# Altium PCB PCB1.PcbDoc
Units mil, origin at the board's own origin, x right, y up, seen from the top; angles counter-clockwise.
Board outline 990 x 2450 mil, 2 copper layers (Top Layer, Bottom Layer); 20 components, 19 nets, 95 pads, 46 vias.
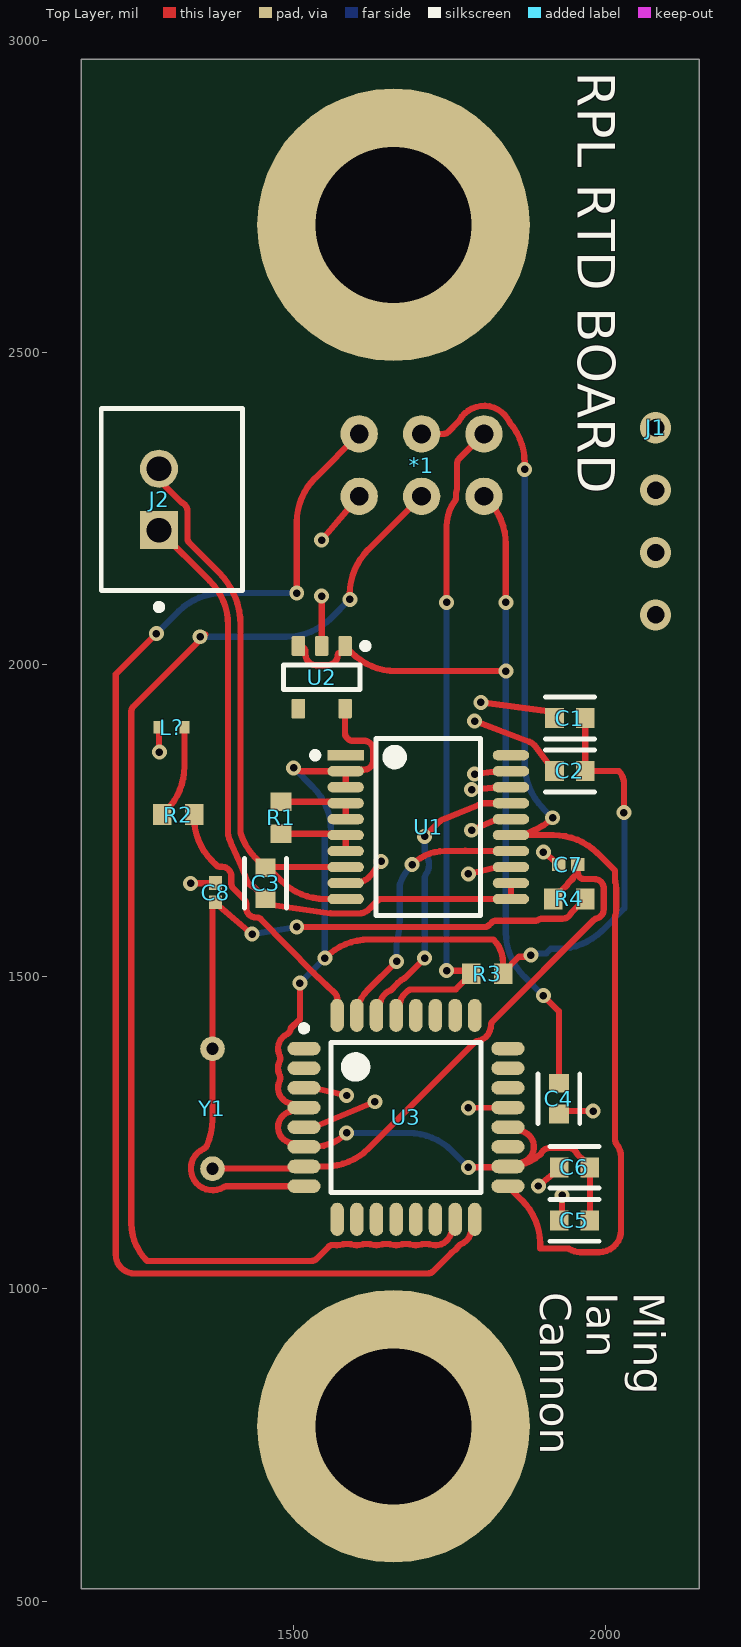
[diagram p0: Top Layer view]
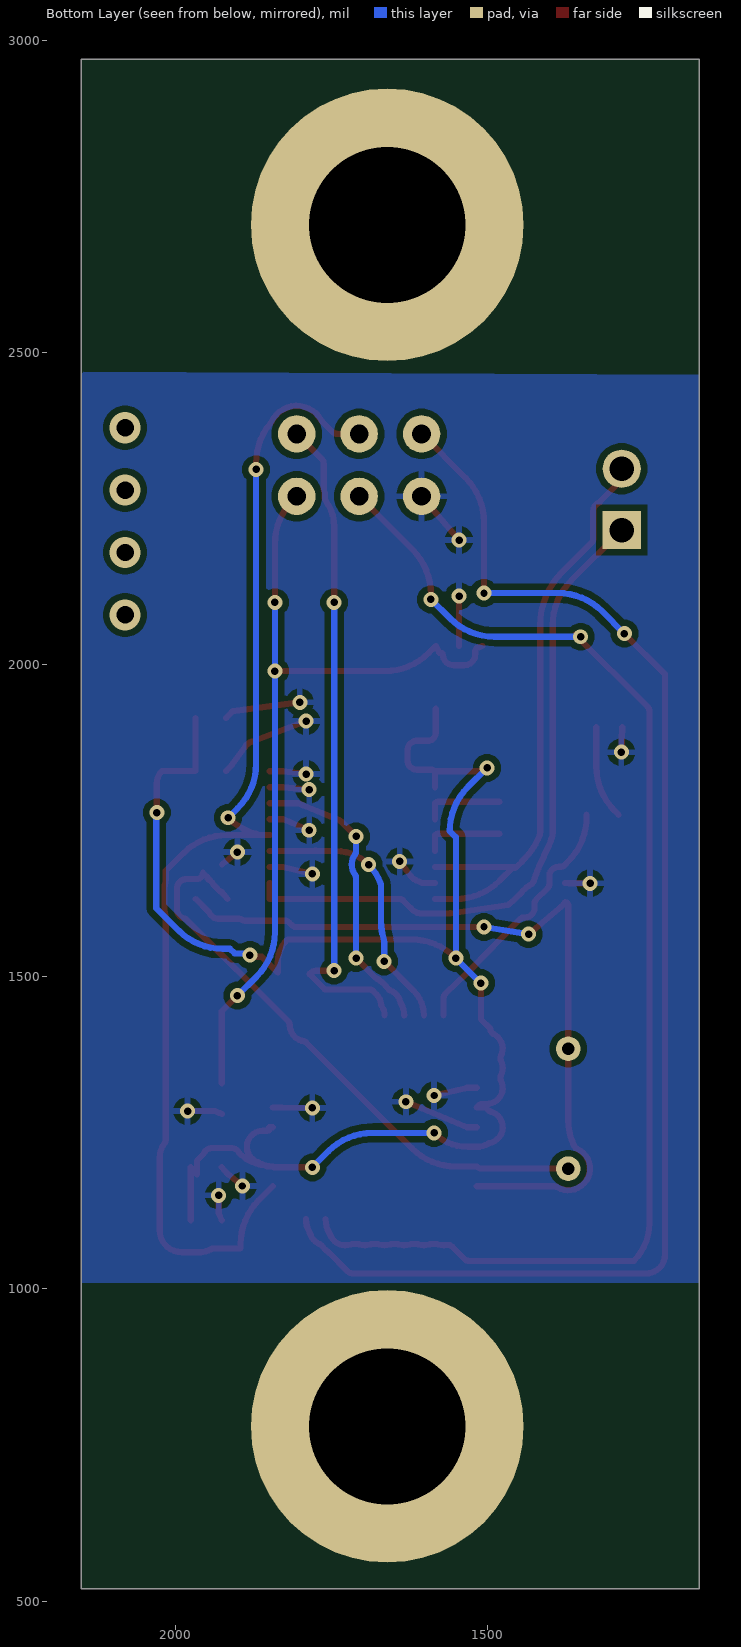
[diagram p1: Bottom Layer view, seen from below]

## Layer stack, top to bottom
Top Solder: solder mask 0.4, Solder Resist, Dk 3.5
Top Layer: signal copper 1.4
Dielectric 1: dielectric 12.6, FR-4, Dk 4.8
Bottom Layer: signal copper 1.4
Bottom Solder: solder mask 0.4, Solder Resist, Dk 3.5

## Board outline
1160,520 2150,520 2150,2970 1160,2970

## Design rules (kind name [scope] priority, off if disabled: settings)
Clearance [All] p1: gap=10 ignorepadtopadclearanceinfootprint=TRUE except(0: Arc-Hole Track-Hole SMDPad-Hole THPad-Hole Via-Hole Fill-Hole Poly-Hole Region-Hole Text-Hole)
PolygonConnect [All] p1: connectstyle=Relief reliefconductorwidth=10 reliefentries=4 polygonreliefangle="90 Angle" airgapwidth=10
RoutingVias Via [All] p1: holewidth=12 width=24 viastyle="Through Hole" minholewidth=12 minwidth=24 maxholewidth=12 maxwidth=24
SolderMaskExpansion [All] p1: expansion=4 istentingtop=FALSE
Width [All] p1: maxlimit=10 minlimit=10 preferedwidth=10
30 further rules are at their usual default settings.

## Components (designator, comment, footprint, x,y, rotation, side; value= is the part's Value field where it differs from the comment)
*1 "AVR ISP 6 PIN HEADER" "AVR ISP 6 PIN HEADER" 1605,2370 r0 top
C1 "100nF" FP-GCM188-0_1-IPC_C 1942.73,1914.81 r0 top
C2 "100nF" FP-GCM188-0_1-IPC_C 1942.73,1830 r180 top
C3 "100nF" FP-GCM188-0_1-IPC_C 1455,1650 r90 top
C4 "100nF" FP-GCM188-0_1-IPC_C 1925,1305 r90 top
C5 "100nF" FP-GCM188-0_1-IPC_C 1950,1110 r0 top
C6 "100nF" FP-GCM188-0_1-IPC_C 1950,1195 r0 top
C7 "22p" CAPC1005X06L 1940,1680 r180 top
C8 "22p" CAPC1005X06L 1375,1635 r90 top
J1 "JST-XH 4" C146120 2080,2380 r270 top
J2 "JST-XH 2" FP-B2B-XH-A_LF_SN-MFG 1305,2265 r90 top
L? "Blue LED" C165977 1283.66,1900 r0 top
R1 "5k1" RESC1608X06L 1480,1755 r90 top
R2 "330" RESC1608X06L 1315,1760 r0 top
R3 "10k" RESC1608X06L 1810,1505 r0 top
R4 "1MOhm" RESC1608X06L 1941.51,1625 r0 top
U1 "RTD-DIGITAL CONVERTER" FP-A20-1-IPC_C 1715.75,1740 r0 top
U2 "Linear Regulator" DBV0005A_L 1545,1980 r270 top
U3 "ATMEGA328P-AU" 32A_L 1680,1275 r0 top
Y1 "8Mhz" C107425 1370,1192.87 r90 top

## Footprints (in the part's own frame and the unit in brackets; to place one, negate y for a bottom-side part, rotate by r counter-clockwise, add the part's x,y. Pads: shape width x height; smd on the part's side, far side on the other; paste and mask are expansions set on the pad)
32A_L [mm] "Thin QFP, 32-Leads, Body 7x7mm, Pitch 0.8mm, IPC High Density"
  oval 1.35x0.55 smd: 1(-4.15,2.8) 2(-4.15,2) 3(-4.15,1.2) 4(-4.15,0.4) 5(-4.15,-0.4) 6(-4.15,-1.2) 7(-4.15,-2) 8(-4.15,-2.8) 17(4.15,-2.8) 18(4.15,-2) 19(4.15,-1.2) 20(4.15,-0.4) 21(4.15,0.4) 22(4.15,1.2) 23(4.15,2) 24(4.15,2.8)
  oval 0.55x1.35 smd: 9(-2.8,-4.15) 10(-2,-4.15) 11(-1.2,-4.15) 12(-0.4,-4.15) 13(0.4,-4.15) 14(1.2,-4.15) 15(2,-4.15) 16(2.8,-4.15) 25(2.8,4.15) 26(2,4.15) 27(1.2,4.15) 28(0.4,4.15) 29(-0.4,4.15) 30(-1.2,4.15) 31(-2,4.15) 32(-2.8,4.15)
  silkscreen extent -4.27,-3.05 3.05,3.75, body extent -3.5,-3.5 3.5,3.5, height 1.2
"AVR ISP 6 PIN HEADER" [mil]
  round 60 hole 30: 1(0,0) 2(100,0) 3(200,0) 4(0,-100) 5(100,-100) 6(200,-100)
C107425 [mm]
  round 1 hole 0.5: 1(0,0) 2(4.88,0)
C146120 [mil]
C165977 [mm]
  rect 0.4x0.5 smd: 1(0,0) 2(1.05,0)
CAPC1005X06L [mm] "Chip Capacitor, 2-Leads, Body 1.00x0.50mm, IPC High Density"
  rect 0.56x0.52 smd: 1(-0.39,0) 2(0.39,0)
  body extent -0.53,-0.28 0.53,0.28, height 0.55
DBV0005A_L [mm] "SOT23, 5-Leads, Body 3.05x1.75mm, Pitch 0.95mm, IPC High Density"
  rrect18% 0.8x0.55 smd: 1(-1.275,0.95) 2(-1.275,0) 3(-1.275,-0.95) 4(1.275,-0.95) 5(1.275,0.95)
  silkscreen extent -1.4,-1.55 0.5,1.9, body extent -1.42,-1.46 1.42,1.46, height 1.08
FP-A20-1-IPC_C [mm]
  rect 1.482x0.418 smd paste+0 mask+0: 1(-3.364,2.925)
  rrect100% 1.482x0.418 smd paste+0 mask+0: 2(-3.364,2.275) 3(-3.364,1.625) 4(-3.364,0.975) 5(-3.364,0.325) 6(-3.364,-0.325) 7(-3.364,-0.975) 8(-3.364,-1.625) 9(-3.364,-2.275) 10(-3.364,-2.925) 11(3.364,-2.925) 12(3.364,-2.275) 13(3.364,-1.625) 14(3.364,-0.975) 15(3.364,-0.325) 16(3.364,0.325) 17(3.364,0.975) 18(3.364,1.625) 19(3.364,2.275) 20(3.364,2.925)
  silkscreen extent -4.73,-3.6 2.12,3.6, body extent -4.2,-3.7 4.2,3.7, height 0.25
FP-B2B-XH-A_LF_SN-MFG [mm]
  rect 1.55x1.55 hole 1 paste-1000 mask+0: 1(-1.25,0.525)
  round 1.55 hole 1 paste-1000 mask+0: 2(1.25,0.525)
  silkscreen extent -4.5,-2.87 3.7,2.88, body extent -3.8,-2.98 3.8,2.98, height 0.25
FP-GCM188-0_1-IPC_C [mil]
  rect 29.87x31.97 smd paste+0 mask+0: 1(-24.67,0) 2(24.67,0)
  silkscreen extent -40,-33 40,33, body extent -44,-22 44,22, height 10
RESC1608X06L [mm] "Chip Resistor, 2-Leads, Body 1.60x0.85mm, IPC High Density"
  rect 0.75x0.85 smd: 1(-0.65,0) 2(0.65,0)
  body extent -0.87,-0.48 0.87,0.48, height 0.55

## Part data
C1 C2 C3 C4 C5 C6: library part C83054, Case/Package=0603, Dielectric=X8R, Max Operating Temperature=150°C, Min Operating Temperature=-55°C, Tolerance=10%, Voltage Rating (DC)=25V, Capacitance=100nF, Depth=0.8mm, Lead Free="Lead Free", Length=1.6mm, Packaging="Tape and Reel", Supplier 1=Digi-Key
C7 C8: library part C161315
J1: library part C146120
J2: library part C20079, "CONN HEADER VERT 2POS 2.5MM", Color=Natural, Contact Resistance=20mR, Current Rating=3A, Housing Color=White, Insulation Resistance=1GR, Max Operating Temperature=85°C, Max Voltage Rating (AC)=250V, Min Operating Temperature=-25°C, Supplier Part Number 1=8201554, Connector Type="Male Pin", Contact Material=Brass, Contact Plating=Tin, Contact Type="Male Pin", Depth=5.75mm, Fastening Type=Detent, Housing Material=Polyamide, Lead Free="Lead Free", Lead Pitch=2.5mm, Length=7.4mm, Max Current Rating=3A, Max Voltage Rating (DC)=250V, Mount="Through Hole", Number of Contacts=2, Number of Positions=2, Number of Rows=1, Orientation=Straight, Packaging=Bulk, Pitch=2.5mm, REACH SVHC="No SVHC", Series=XH, Supplier 1=RSComponents, Termination=Solder, Voltage Rating=250V, Voltage Rating (AC)=250V, Wire/Cable Gauge=22AWG
L?: library part C165977
R1: library part C23186, Manufacturer=Panasonic, Part Number=ERJ-3EKF5101V
R2: library part C23138, Manufacturer=Panasonic, Part Number=ERJ1GNF1004C
R3: library part C25804, Manufacturer=Panasonic, Part Number=ERJ-3EKF5101V
R4: library part C22935, Manufacturer=Panasonic, Part Number=ERJ1GNF1004C
U1: library part C779509, "IC RTD TO DIGITAL CONVERT 20SSOP", Case/Package=SSOP, Max Operating Temperature=125°C, Min Operating Temperature=-40°C, Mount="Surface Mount", Output Type=SPI, Packaging="Tape and Reel"
U2: library part C202242, "Single Output Fast Transient Response LDO, 250 mA, Fixed 3.3 V Output, 1.8 to 12 V Input, 5-pin SOT-23 (DBV), -55 to 125 degC, Green (RoHS & no Sb/Br)", Manufacturer="Texas Instruments", PartNumber=REG102NA-3.3/3K, Accuracy(%)=1.5, Code_JEDEC=MO-178, ComponentLink1Description="Manufacturer URL", ComponentLink1URL=http://www.ti.com/, ComponentLink2Description=Datasheet, ComponentLink2URL=http://www.ti.com/general/docs/lit/getliterature.tsp?genericPartNumber=REG102-33&fileType=pdf, ComponentLink3Description="Package Specification", ComponentLink3URL=http://www.ti.com/litv/pdf/mpds018i, DatasheetVersion=SBVS024F, Eco-Plan="Green (RoHS & no Sb/Br)", Fixed Output Options(V)=3.3, Iout(Max)(A)=0.25, Iq(Typ)(mA)=0.4, Mounting Technology="Surface Mount", PackageDescription="5-Pin Plastic Small Outline, Body 1.60 Ãƒâ€” 2.90 mm, Pitch 0.95 mm", PackageReference=DBV0005A, PackageVersion=4073253-4/K, SubFamily="Single Channel LDO", Vdo(Typ)(mV)=150, Vin(Max)(V)=12, Vin(Min)(V)=1.8, Vout Adj(Max)(V)=3.3, Vout Adj(Min)(V)=3.3
U3: library part C14877, "8-bit AVR Microcontroller, 32KB Flash, 1KB EEPROM, 2KB SRAM, 32-pin TQFP, Industrial Grade (-40°C to 85°C)", Supplier Part Number 1=1310271, Code_JEDEC=MS-026-ABA, ComponentLink1Description="Manufacturer URL", ComponentLink1URL=http://www.atmel.com/, ComponentLink2Description="ATmega48A/48PA/88A/88PA/168A/168PA/328/328P Datasheet", ComponentLink2URL=http://www.atmel.com/dyn/resources/prod_documents/doc8271.pdf, ComponentLink3Description="ATmega48A/48PA/88A/88PA/168A/168PA/328/328P Summary", ComponentLink3URL=http://www.atmel.com/dyn/resources/prod_documents/8271S.pdf, DatasheetVersion="revD, May-2011", PackageDescription="32-Lead, 7x7x1.0 mm Body, 0.8mm Lead Pitch, Thin Profile Plastic Quad Flat Package (TQFP)", PackageReference=32A, PackageVersion="revC, Oct-2010", RevisionNote="DatasheetVersion & PackageVersion updated. URLs added.", Supplier 1=RSComponents
Y1: library part C107425, "Resistance Weld Crystal, 8 MHz, +/- 30 ppm, -20 to 70 degC, 2-Pin SMD, RoHS, Tape and Reel", Case/Package=SMD/SMT, ESR (Equivalent Series Resistance)=80Ohm, Frequency=8MHz, Frequency Stability=50ppm, Frequency Tolerance=30ppm, Load Capacitance=20pF, Manufacturer="FOX Electronics", Max Operating Temperature=70degC, Min Operating Temperature=-20degC, Package Description="2-Pin Surface Mount Device, Body 5 x 11.7 mm", Package Quantity=1000, Package Reference=HC49SDLF, Datasheet URL=http://www.foxonline.com/pdfs/hc49sdlf.pdf, Datasheet Version=42064.0, Depth=5mm, Height=4.5mm, Lead Free=LeadFree, Length=11.7mm, Manufacturer URL=http://www.foxonline.com/, Mount=SurfaceMount, Number of Pins=2, Packaging=TapeandReel, Radiation Hardening=No, REACH SVHC=NoSVHC, RoHSCompliant=True, Series Resistance=80Ohm, Termination=SMD/SMT, Tolerance=50ppm, Width=5mm

## Free pads (board coordinates)
  round 437 hole 250: 0(1660,780) 0(1660,2705)

## Via types
v1: diameter 24, hole 12, Top Layer to Bottom Layer, 42 vias
v2: diameter 50, hole 28, Top Layer to Bottom Layer, 4 vias

## Nets (pads, with @x,y where several pads share a name; then routed paths per layer and width w, separated by ;. In a path a pad name is that pad's centre, name@x,y a point inside that pad or via, vN(x,y) a via of type N, cw(c..) or ccw(c..) an arc to the next point about the centre after c; other vN are vias at no path point)
3V3: C1.2 C2.1 C5.2 C6.2 R3.2 U1.2 U1.3 U2.5 U3.4 U3.6 U3.18 U3.20 | length 2683.9
  Top Layer w10: v1(1500,1835) ccw(c1513.12,1848.12) 1513.12,1829.57 U1.2 ; v1(1510,1490) 1510,1432.31 1495,1417.31 cw(c1485,1417.36) 1489.47,1408.41 ccw(c1500.87,1385.24) 1477.68,1373.85 cw(c1468.69,1369.49) 1477.68,1365.12 ccw(c1500.87,1353.74) 1477.68,1342.36 cw(c1468.69,1337.99) 1477.69,1333.63 ccw(c1500.87,1322.24) 1500.87,1296.42 1506.97,1296.42 cw(c1506.92,1286.42) 1514.28,1293.19 ccw(c1568.79,1342.93) 1516.39,1290.97 cw(c1509.25,1283.97) 1516.54,1290.81 U3.4@1516.54,1290.75 ; v1(1550,1530) 1550.71,1530.71 cw(c1621.42,1460) 1621.42,1560 1820,1560 cw(c1782.36,1522.36) 1835.59,1522.36 1835.59,1506.97 1860.94,1532.32 1877.32,1532.32 v1(1880,1535) ; U2.5 1582.4,1890.13 ccw(c1592.4,1890.13) 1585.32,1883.07 1587.09,1881.3 ccw(c1594.14,1888.39) 1594.14,1878.39 1612.5,1878.39 cw(c1612.5,1863.39) 1627.5,1863.39 1627.5,1846.93 cw(c1612.5,1846.93) 1612.5,1831.93 1589.73,1831.93 ccw(c1589.78,1821.93) U1.2 ; U1.3 U1.2 ; v1(1585,1250) cw(c1531.3,1303.7) 1531.3,1227.76 U3.6 cw(c1516.61,1262.45) 1498.67,1232.76 ccw(c1493.52,1224.19) 1495.55,1233.98 cw(c1500.87,1259.25) 1493.85,1284.11 ccw(c1491.07,1293.71) 1498.1,1286.61 1500.79,1289.3 ccw(c1493.67,1296.32) 1501.98,1290.75 U3.4@1516.54,1290.75 ; v1(1780,1195) 1840.34,1195 ccw(c1840.34,1199.3) U3.18 ; U3.20 1849.06,1259.25 1849.06,1254.48 ccw(c1853.2,1263.58) 1853.2,1253.58 1859.13,1253.58 cw(c1859.13,1227.76) 1867.54,1203.33 ccw(c1870.83,1193.89) 1865.69,1202.47 cw(c1843.39,1239.41) U3.18 ; C1.2 C2.1 2020.89,1830 cw(c2000.75,1809.86) 2029.23,1809.86 v1(2029.23,1763.09) ; C5.2 C6.2 1964.74,1184.01 1964.74,1205.87 cw(c1971.71,1213.04) 1964.7,1205.91 1955.55,1215.06 cw(c1962.66,1222.1) 1953.72,1217.61 ccw(c1940.26,1210.99) 1940.26,1225.99 1910.39,1225.99 ccw(c1910.39,1210.99) 1897.16,1218.06 cw(c1888.37,1222.82) 1894.89,1215.24 cw(c1843.39,1275.62) U3.18 ; U3.4@1516.54,1290.75 U3.4 U3.4@1516.54,1290.75
  Bottom Layer w10: v1(1500,1835) 1530.71,1804.29 cw(c1460,1733.58) 1560,1733.58 1550,1723.58 v1(1550,1530) v1(1510,1490) ; v1(1585,1250) 1683.58,1250 cw(c1683.58,1150) 1754.29,1220.71 v1(1780,1195) ; v1(1880,1535) 1882.68,1537.68 1904.68,1537.68 1912,1545 1923.58,1545 ccw(c1923.58,1645) 1994.29,1574.29 2030,1610 2030,1761.25 ccw(c2027.39,1761.25) v1(2029.23,1763.09)
+5: *1.6 C4.2 U2.1 U2.3 | length 1354.8
  Top Layer w10: U2.3 1513.42,2027.83 1515.56,2027.83 cw(c1509.17,2020.13) 1519.17,2020.18 1519.17,2016.4 ccw(c1536.12,2016.4) 1536.12,1999.45 1553.88,1999.45 ccw(c1553.88,2016.4) 1570.78,2015.19 cw(c1580.75,2014.4) 1571.75,2018.75 1576.58,2019.45 U2.1 1593.31,2019.29 ccw(c1664.02,2090) 1664.02,1990 v1(1840,1990) ; *1.6@1810.71,2264.29 cw(c1740,2193.58) 1840,2193.58 v1(1840,2100) ; v1(1900,1470) 1925,1445 C4.2
  Bottom Layer w10: v1(1840,2100) v1(1840,1990) 1840,1571.42 ccw(c1940,1571.42) 1869.29,1500.71 v1(1900,1470)
GND: *1.4 C1.1 C2.2 C4.1 C5.1 C6.1 C7.2 C8.2 L?.1 U1.9 U1.13 U1.16 U1.18 U1.19 U2.2 U3.3 U3.5 U3.21 | length 1290.2
  Top Layer w10: L?.1 v1(1285,1860) ; v1(1335,1650) 1369.76,1650 C8.2 ; U3.5 1532.36,1259.25 v1(1630,1300) ; U3.3 1532.36,1322.24 v1(1585,1310) ; U2.2 v1(1545,2110) ; v1(1545,2200) *1.4 ; U1.9 1604.27,1650.43 1614.02,1654.94 ccw(c1604.27,1676.02) 1622.87,1662.11 v1(1640,1685) ; v1(1780,1290) 1827.64,1290.75 U3.21 ; v1(1780,1665) 1827.23,1676.02 U1.13 ; v1(1785,1735) 1827.23,1752.8 U1.16 ; v1(1785,1800) 1827.23,1803.98 U1.18 ; v1(1790,1825) 1827.23,1829.57 U1.19 ; v1(1790,1910) 1877.37,1876.88 cw(c1869.14,1855.16) 1887.93,1868.8 1908.12,1840.99 C2.2 ; v1(1800,1940) 1908.12,1925.8 C1.1 ; v1(1891.96,1165.01) 1915.39,1184.01 C6.1 ; v1(1900,1700) 1918.62,1685.24 C7.2 ; C4.1 1935.99,1285 v1(1980,1285) ; C5.1 1930,1120.99 v1(1930,1150)
LED: R2.2 U3.32 | length 422
  Top Layer w10: R2.2 1340.88,1748.27 1340.88,1748.16 ccw(c1440.59,1755.83) 1369.86,1685.14 1375.67,1679.33 ccw(c1382.76,1686.38) 1382.76,1676.38 1385.24,1676.38 cw(c1385.24,1661.38) 1400.24,1661.38 1400.24,1649.14 ccw(c1410.24,1649.14) 1403.18,1642.06 1421.1,1624.13 cw(c1414.01,1617.08) 1424.01,1617.08 1424.01,1610.39 ccw(c1439.01,1610.39) 1439.01,1595.39 1440.47,1595.39 cw(c1440.47,1585.39) 1447.52,1592.48 cw(c1440.47,1585.39) 1447.6,1592.4 1531.46,1506.98 ccw(c1560,1535) 1532.38,1506.07 1566.67,1473.33 cw(c1559.76,1466.09) 1566.85,1473.15 cw(c1559.76,1466.09) 1569.76,1466.09 U3.32
MISO: *1.1 U3.16 | length 2198.5
  Top Layer w10: v1(1280,2050) 1215,1985 1215,1055 ccw(c1245,1055) 1245,1025 1715.86,1025 ccw(c1715.86,1035) 1722.91,1027.91 1752.27,1057.27 cw(c1759.31,1050.16) 1753.53,1058.33 ccw(c1727.24,1095.87) 1764.09,1068.61 cw(c1772.09,1062.62) 1768.33,1071.89 ccw(c1758.74,1095.87) 1783.63,1088.96 cw(c1793.25,1086.26) 1784.64,1091.33 ccw(c1750.7,1111.61) U3.16 ; v1(1505,2115) 1505,2228.58 cw(c1605,2228.58) 1534.29,2299.29 *1.1
  Bottom Layer w10: v1(1280,2050) 1315.71,2085.71 cw(c1386.42,2015) 1386.42,2115 v1(1505,2115)
MOSI: *1.5 U3.15 | length 2068.9
  Top Layer w10: v1(1350,2045) ccw(c1350,2057.07) 1358.52,2048.52 1242.91,1932.91 ccw(c1250,1925.86) 1240,1925.86 1240,1782.32 cw(c1230,1782.36) 1239.93,1781.15 ccw(c1274.65,1776.73) 1239.65,1776.73 1239.65,1743.27 ccw(c1274.65,1743.27) 1239.93,1738.85 cw(c1230,1737.64) 1240,1737.68 1240,1105.31 ccw(c1325.36,1105.36) 1265,1045 1529.03,1045 ccw(c1529.03,1055) 1536.08,1047.91 1555.96,1067.79 cw(c1562.99,1060.68) 1564.87,1070.51 ccw(c1569.76,1095.87) 1578.01,1071.39 cw(c1581.22,1061.92) 1581.18,1071.92 1589.85,1071.92 cw(c1589.8,1061.92) 1592.97,1071.41 ccw(c1601.26,1095.87) 1609.51,1071.39 cw(c1612.72,1061.92) 1612.67,1071.92 1621.34,1071.92 cw(c1621.3,1061.92) 1624.46,1071.41 ccw(c1632.76,1095.87) 1641,1071.39 cw(c1644.21,1061.92) 1644.17,1071.92 1652.84,1071.92 cw(c1652.8,1061.92) 1655.96,1071.41 ccw(c1664.25,1095.87) 1672.5,1071.39 cw(c1675.71,1061.92) 1675.66,1071.92 1684.34,1071.92 cw(c1684.29,1061.92) 1687.45,1071.41 ccw(c1695.75,1095.87) 1704,1071.39 cw(c1707.2,1061.92) 1707.16,1071.92 1715.83,1071.92 cw(c1715.79,1061.92) 1718.95,1071.41 ccw(c1727.24,1095.87) 1751.67,1087.48 cw(c1761.11,1084.17) 1752.52,1089.3 ccw(c1715.59,1111.61) U3.15 ; v1(1590,2105) 1590,2113.58 cw(c1690,2113.58) 1619.29,2184.29 *1.5
  Bottom Layer w10: v1(1350,2045) 1488.58,2045 ccw(c1488.58,2145) 1559.29,2074.29 v1(1590,2105)
NetC3_1: C3.1 J2.1 U1.11 U1.12 | length 1083.2
  Top Layer w10: J2.1 1365.71,2134.41 cw(c1295,2063.69) 1395,2063.69 1395,1731.51 ccw(c1425,1731.52) 1396.5,1722.15 ccw(c1415.52,1728.33) 1396.53,1722.04 ccw(c1415.52,1728.33) 1396.63,1721.77 ccw(c1510,1761.1) 1400.94,1711.04 1417.04,1675.99 cw(c1385.24,1661.38) 1418.16,1673.25 1424.92,1654.59 ccw(c1439.01,1659.74) 1432.42,1646.27 1434.14,1645.42 cw(c1429.74,1636.44) 1436.7,1643.62 1436.76,1643.57 1444.21,1636.12 1444.21,1635.26 C3.1 1465.99,1615.39 1559.08,1601.85 ccw(c1562.37,1624.84) 1562.37,1601.61 1604.27,1601.61 ccw(c1604.27,1624.84) 1621.94,1609.76 cw(c1629.51,1603.23) 1622.4,1610.26 1634.07,1621.93 cw(c1641.13,1614.84) 1641.13,1624.84 U1.11 U1.12
NetC3_2: C3.2 J2.2 U1.8 U1.10 | length 972.4
  Top Layer w10: J2.2 1284.33,2300.2 ccw(c1294.33,2300.2) 1287.25,2293.14 1318.61,2261.77 ccw(c1325.72,2268.81) 1321.33,2259.82 cw(c1314.84,2246.3) 1329.84,2246.3 1329.84,2202.7 ccw(c1339.84,2202.7) 1332.75,2195.65 1380,2148.4 cw(c1295,2063.69) 1415,2063.69 1415,1731.47 ccw(c1425,1731.52) 1415.52,1728.33 ccw(c1510,1761.1) 1439.31,1690.37 1443.91,1685.76 1444.01,1684.61 C3.2 cw(c1458.26,1671.41) C3.2@1458.26,1676.02 ; U1.10 1550.86,1624.84 cw(c1550.86,1724.84) 1480.15,1654.13 C3.2@1458.26,1676.02 ; U1.8 C3.2@1458.26,1676.02
NetL?_2: L?.2 R2.1 | length 150.4
  Top Layer w10: R2.1 1295.71,1766.3 ccw(c1225,1837.01) 1325,1837.01 L?.2
NetR1_1: R1.1 U1.6 U1.7 | length 129.5
  Top Layer w10: R1.1 1578,1729.41 cw(c1578,1721.88) U1.6 U1.7
NetR1_2: R1.2 U1.4 U1.5 | length 129.5
  Top Layer w10: R1.2 1578,1780.59 cw(c1578,1773.07) U1.4 U1.5
RESET: *1.3 R3.1 U3.29 | length 1079
  Top Layer w10: U3.29 cw(c1690.48,1438.39) 1668.54,1452.77 ccw(c1660.15,1458.21) 1670.08,1457.03 cw(c1695.75,1454.13) 1677.55,1472.46 1682.18,1477.09 cw(c1689.23,1470) 1689.23,1480 1760,1480 1783.99,1503.99 ccw(c1782.98,1505) R3.1 ccw(c1772.34,1492.93) 1772.34,1510 v1(1745,1510) ; v1(1745,2100) 1745,2221.72 cw(c1813.28,2221.72) 1758.15,2262 ccw(c1750.04,2267.85) 1760.04,2268.22 cw(c1805,2270) 1761.56,2281.76 ccw(c1751.9,2284.32) 1761.9,2284.28 1761.9,2322.76 cw(c1771.9,2322.76) 1764.81,2329.81 *1.3
  Bottom Layer w10: v1(1745,1510) v1(1745,2100)
SCK: *1.2 U1.15 U3.17 | length 1931
  Top Layer w10: *1.2 1740.24,2370 ccw(c1740.24,2380) 1747.3,2372.91 1763.99,2389.6 ccw(c1756.88,2396.64) 1765.61,2391.77 cw(c1805,2370) 1845.95,2388.65 cw(c1770.16,2323.42) 1870.16,2323.42 v1(1870.16,2313) ; U3.17 1865.71,1142.44 cw(c1795,1071.73) 1895,1071.73 1895,1065 1937.36,1065 cw(c1937.31,1055) 1942.26,1063.69 ccw(c1959.74,1094.01) 1949.59,1060.52 1950.3,1060.3 ccw(c1959,1089.01) 1958.95,1059.01 1989.61,1059.01 ccw(c1989.61,1094.01) 2024.61,1094.01 2024.61,1210.99 ccw(c1989.61,1210.99) 2017.11,1232.64 cw(c2025,1238.78) 2015,1238.74 2015,1595.5 cw(c2025,1595.46) 2015.4,1598.27 ccw(c1981.86,1608.27) 2016.86,1608.27 2016.86,1641.73 ccw(c1981.86,1641.73) 2015.4,1651.73 cw(c2025,1654.54) 2015,1654.5 2015,1670 1987.09,1697.91 ccw(c1916.37,1627.2) 1916.37,1727.2 U1.15 1869.14,1727.2 1869.15,1729.14 cw(c1872.58,1719.75) 1871.5,1729.69 ccw(c1869.14,1752.8) 1881.43,1733.09 cw(c1886.67,1724.57) 1882.94,1733.85 ccw(c1848.18,1821.41) 1914.79,1754.79 v1(1915,1755)
  Bottom Layer w10: v1(1870.16,2313) 1870.16,1841.26 ccw(c1970.16,1841.26) 1899.45,1770.55 v1(1915,1755)
SCL: U3.28
SDA: U3.27
SDI: U1.14 U3.31 | length 436.1
  Top Layer w10: U3.31 cw(c1656.48,1438.39) 1617.43,1477.43 v1(1665,1525) ; v1(1690,1680) cw(c1742.18,1627.82) 1742.18,1701.61 ccw(c1742.18,1711.61) 1742.3,1701.61 1774.68,1702 cw(c1775,1675) 1775.2,1702 1827.23,1701.61 U1.14
  Bottom Layer w10: v1(1665,1525) 1665,1555.76 cw(c1675,1555.71) 1665.37,1558.42 ccw(c1550,1591.42) 1670,1591.42 1670,1646.68 cw(c1680,1646.64) 1670.65,1650.18 cw(c1750.36,1619.64) v1(1690,1680)
SDO: U1.17 U3.30 | length 476
  Top Layer w10: U3.30 cw(c1667.45,1438.39) 1637.77,1456.34 ccw(c1629.19,1461.48) 1638.97,1459.41 cw(c1664.25,1454.13) 1654.67,1478.12 ccw(c1650.9,1487.38) 1658.91,1481.39 cw(c1695.75,1454.13) 1663.44,1486.63 1667.98,1491.17 cw(c1689.23,1470) 1676.28,1497.06 ccw(c1671.92,1506.06) 1678.95,1498.95 v1(1710,1530) ; v1(1710,1725) 1734.06,1749.06 ; 1734.09,1749.09 cw(c1741.09,1741.95) 1737.29,1751.2 1795.31,1775.05 ccw(c1785,1800) 1796.28,1775.47 1800.63,1777.47 cw(c1804.81,1768.39) 1804.81,1778.39 U1.17
  Bottom Layer w10: v1(1710,1530) 1710,1658.39 cw(c1720,1658.34) 1711.88,1664.18 ccw(c1690,1680) 1711.87,1695.83 cw(c1720,1701.66) 1710,1701.61 v1(1710,1725)
XTAL_1: C7.1 R4.1 U3.7 Y1.1 | length 952.9
  Top Layer w10: Y1.1 1508.44,1192.87 ccw(c1508.44,1204.43) U3.7 1549.84,1196.26 ccw(c1549.84,1296.26) 1620.55,1225.55 1789.47,1394.47 cw(c1796.51,1387.36) 1794.73,1397.21 ccw(c1793.81,1407.16) 1796.89,1397.65 1797.72,1397.92 cw(c1800.81,1388.41) 1797.81,1397.95 ccw(c1790.24,1422.64) 1816.06,1422.16 cw(c1826.06,1421.91) 1818.95,1428.95 1981.2,1591.2 cw(c1988.24,1584.09) 1985.66,1593.76 ccw(c1981.86,1608.27) 1996.86,1608.27 1996.86,1641.73 ccw(c1981.86,1641.73) 1981.86,1656.73 1965.35,1656.73 cw(c1965.35,1666.73) 1955.35,1666.73 1947.19,1658.57 ccw(c1954.3,1651.54) 1946.55,1657.85 1943.53,1654.14 cw(c1935.77,1660.46) 1942.43,1652.99 ccw(c1952.33,1641.73) 1939.08,1648.76 ccw(c1952.33,1641.73) 1938.33,1647.1 ccw(c1965.35,1613.99) 1935.13,1644.21 1927.33,1636.41 1925.68,1636.41 R4.1 ; 1944.82,1654.71 ccw(c1939.75,1663.33) 1947.68,1657.24
XTAL_2: C8.1 R4.2 U3.8 Y1.2 | length 1273.1
  Top Layer w10: v1(1433.35,1568.38) 1380.24,1613.62 C8.1 ccw(c1375,1614.65) 1370,1614.65 Y1.2 1370,1271.42 cw(c1270,1271.42) 1360.74,1229.4 cw(c1351.68,1233.63) 1355.82,1224.53 ccw(c1370,1192.87) 1388.11,1163.29 cw(c1393.33,1154.76) 1393.29,1164.76 U3.8 ; v1(1505,1580) 1805.86,1580 ccw(c1805.86,1590) 1812.91,1582.91 1817.09,1587.09 cw(c1824.14,1580) 1824.14,1590 1886.65,1590 ccw(c1886.65,1600) 1890.95,1590.97 1894.06,1592.45 cw(c1898.36,1583.42) 1899.44,1593.37 ccw(c1901.15,1608.27) 1901.15,1593.27 1930.68,1593.27 ccw(c1930.68,1608.27) 1943.93,1601.24 cw(c1952.74,1596.5) 1945.63,1603.53 R4.2
  Bottom Layer w10: v1(1433.35,1568.38) v1(1505,1580)
pads on no net: U1.1 U1.20 U2.4 U3.1 U3.2 U3.9 U3.10 U3.11 U3.12 U3.13 U3.14 U3.19 U3.22 U3.23 U3.24 U3.25 U3.26
copper on no net:
  other v2: 2080,2080 2080,2180 2080,2280 2080,2380

## Polygon pours and split planes (outlines as drawn)
GND on Bottom Layer "GND_L02_P002" (solid, pour order 2): 1160,2465 1160,1010 2150,1010 2150,2470

## Silkscreen, mask and mechanical layers (free items; w line width, h text height)
Top Overlay:
  text "RPL RTD BOARD" at 1955,2950 h60 r270
  text "Ming  / Ian / Cannon" at 1895,995 h50 r270